# EAGLE board standalone_test (EAGLE 6.3)
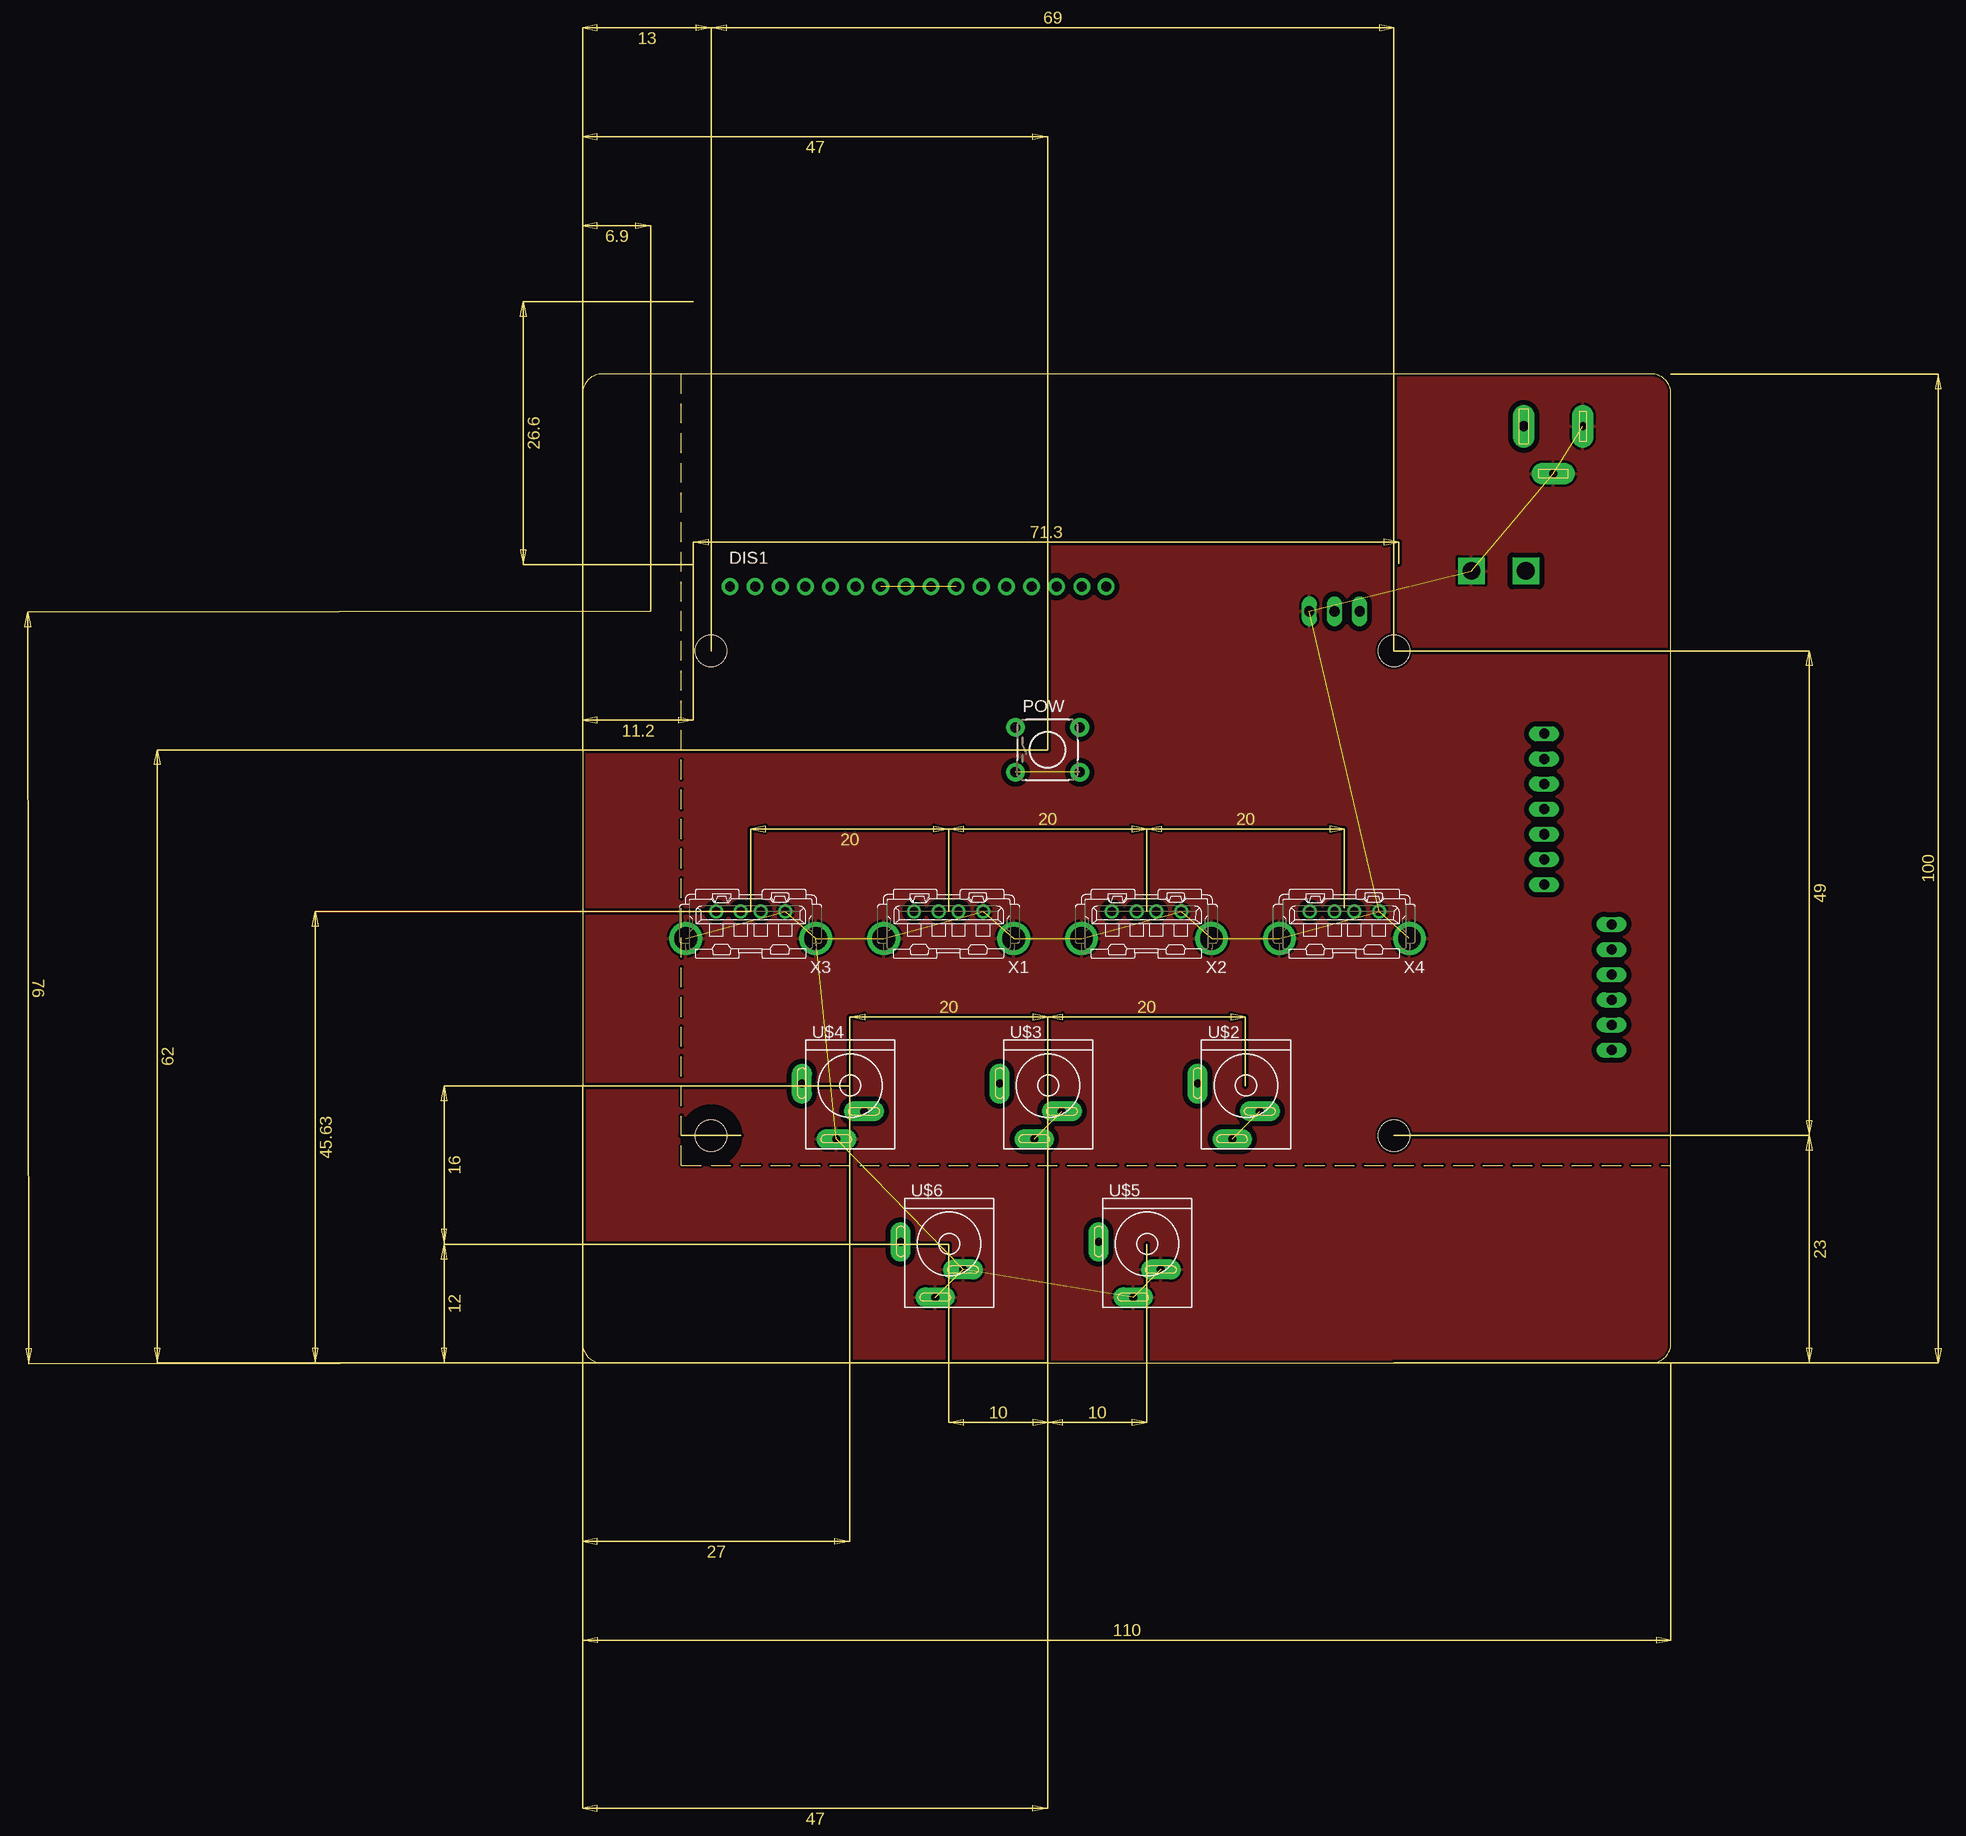
[diagram p0: board, top side]
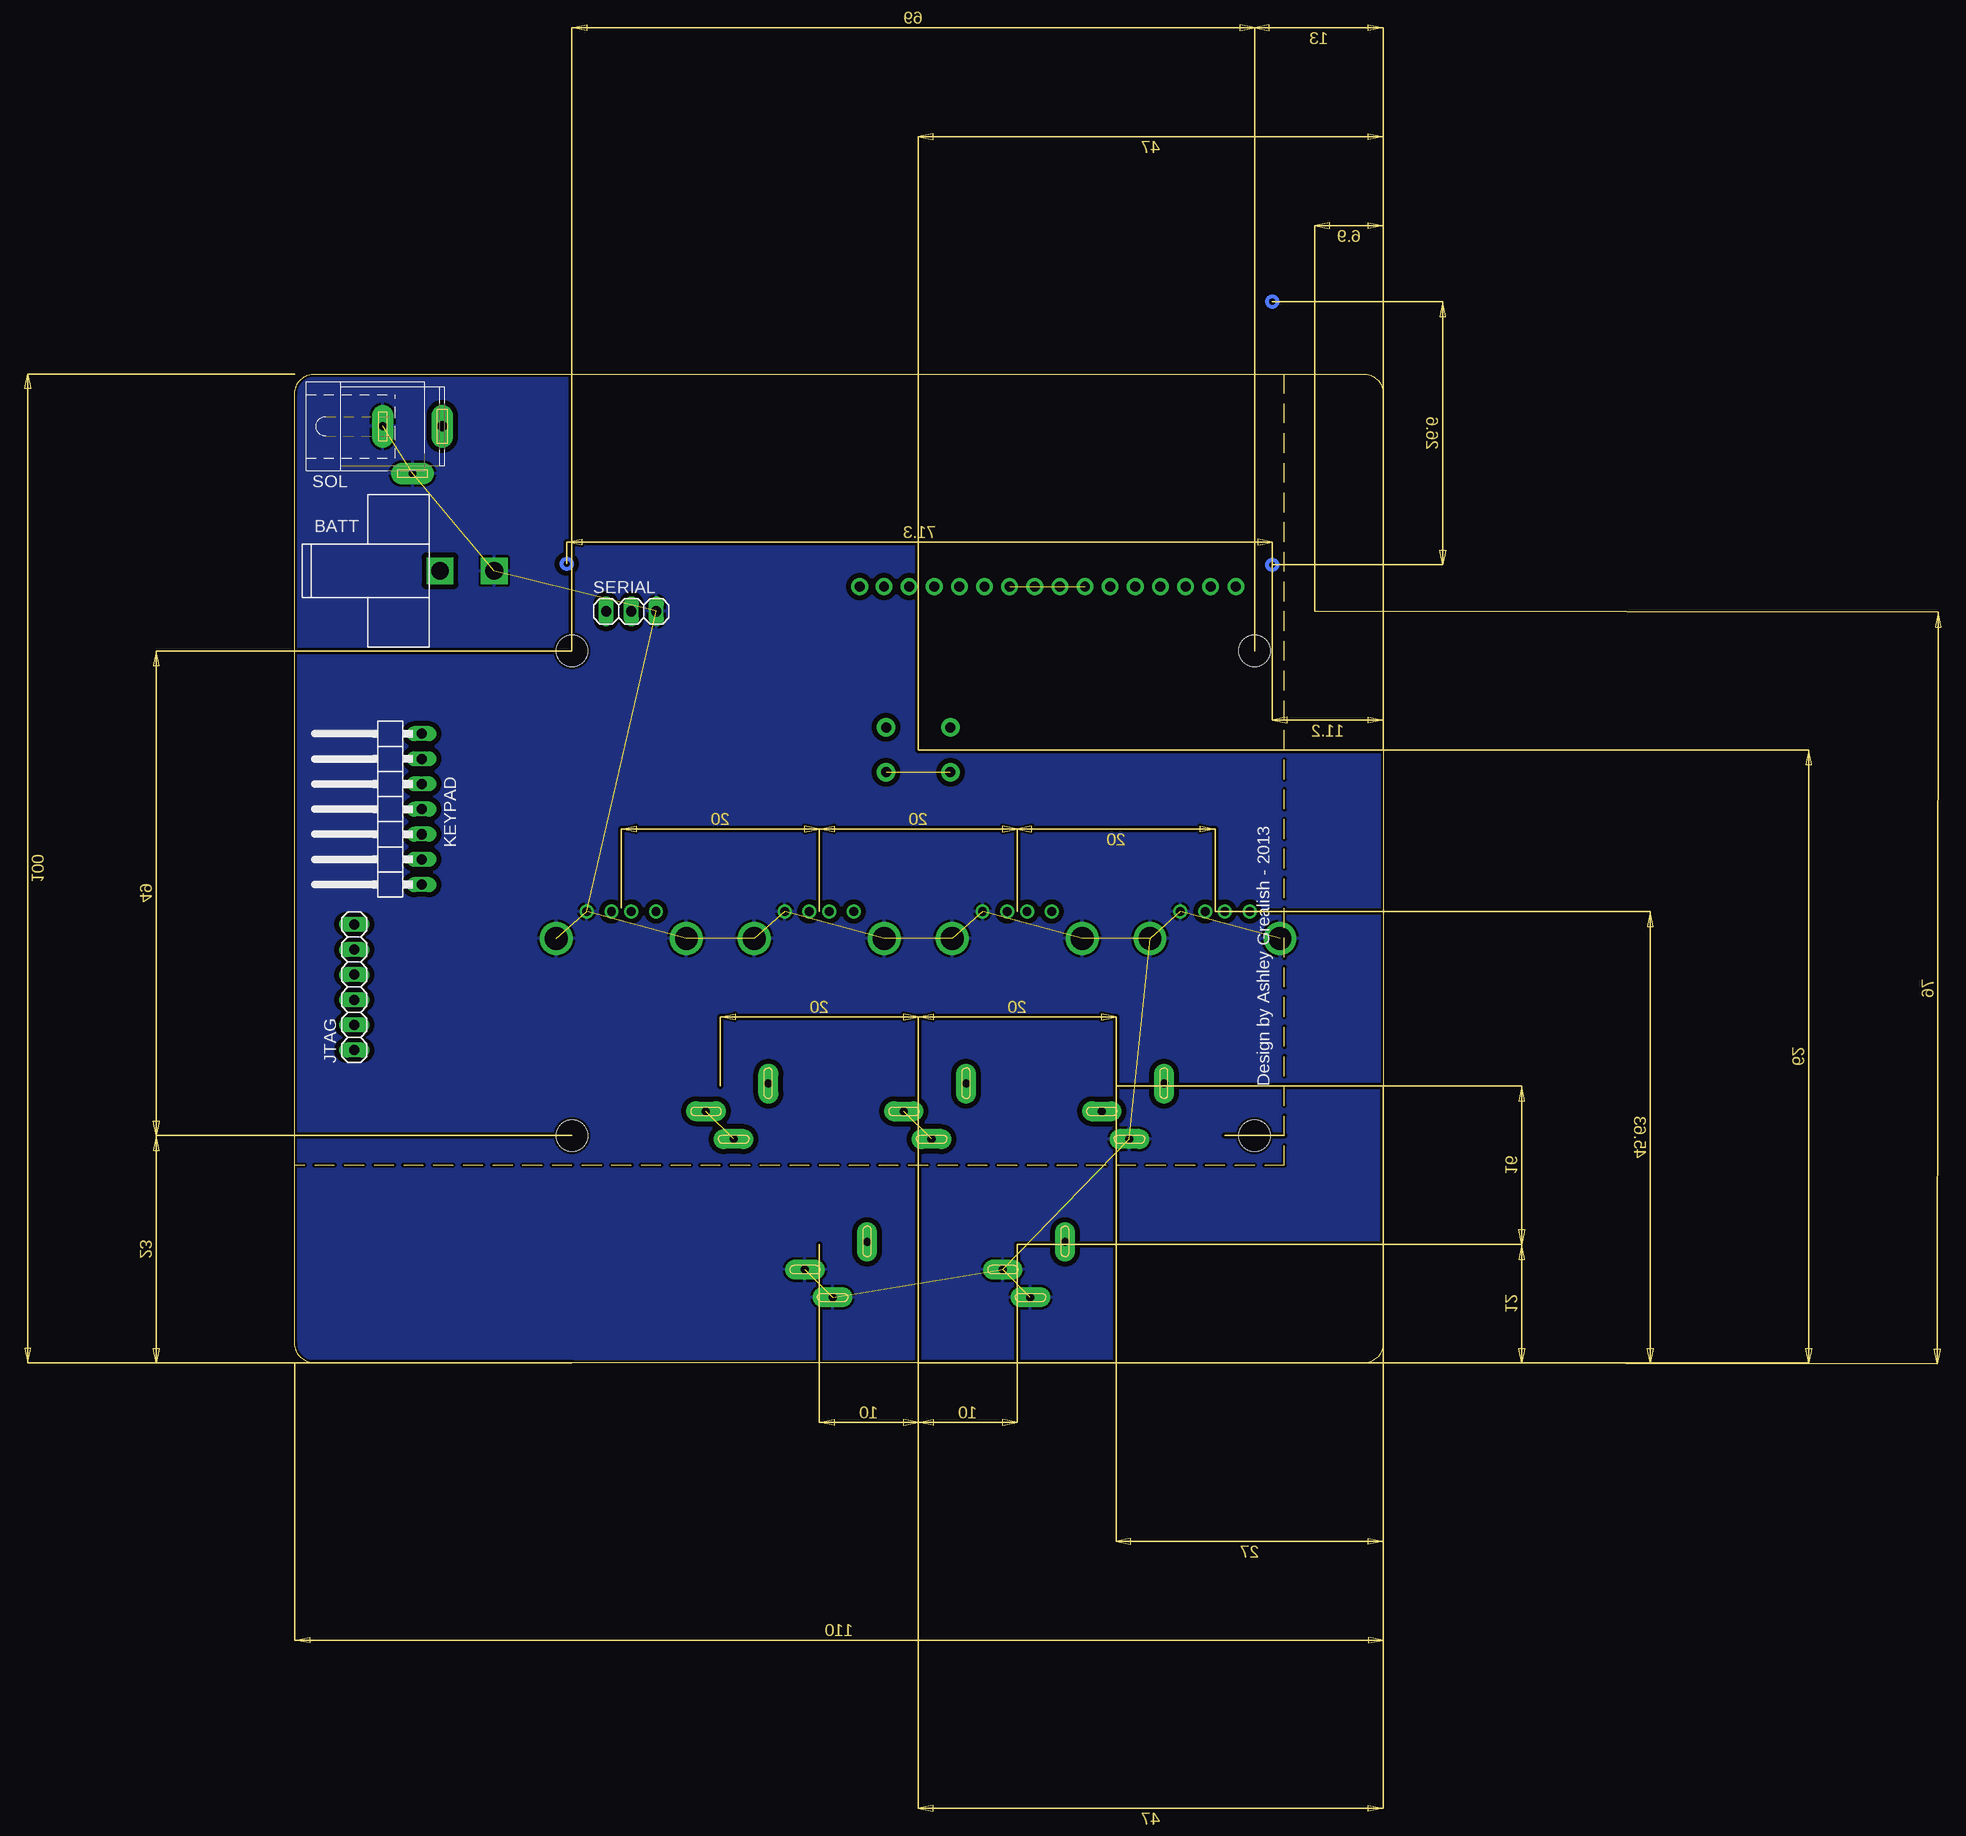
[diagram p1: board, bottom side, seen from below]

Size 110 x 100 mm. Coordinates in mm from the lower left corner, seen from the top.
Outline: 110,20 110,2 arc-90 108,0 2,0 arc-90 0,2 0,98 arc-90 2,100 10,100
Outline: 110,20 110,98 arc90 108,100 10,100
Outline: 10,100 10,20 110,20
Copper layers (1*16): Top 0.035mm / dielectric 1.5mm / Bottom 0.035mm
Design rules "Fusion_eagle_rule_v1.1": minimum track width 6mil, minimum drill 12mil, track to track 6mil, track to pad 6mil, pad to pad 6mil, via to via 6mil, smd to smd 0mil, copper to edge 10mil, drill to drill 10mil, minimum pad ring 10mil, minimum via ring 6mil, stop-mask expansion 2mil, vias tented up to drill 100mil, thermal gap 10mil
Net classes: 0 default: width 0.381 mm, drill 0.61 mm, clearance 0.381 mm; 1 pwr: width 0.026 mm, drill 0.61 mm, clearance 0.508 mm; 2 pow_12v: width 1.372 mm, drill 0.762 mm, clearance 0.508 mm; 3 gnd: width 0.508 mm, drill 0.61 mm
Holes 3.2 mm at 82,72 82,23 13,23 13,72
tRestrict: area 10,20 to 16,26

## Footprints (pad centres in the part's own frame; a part is rotated, then mirrored left to right if it is on the bottom)
MOLEX_39_29_1028 = drill 1.8 square: P$1 0,0; P$2 0,5.5
LCD_16X2_R2 = drill 1 pad 1.676: 1 8,2.5; 2 10.54,2.5; 3 13.08,2.5; 4 15.62,2.5; 5 18.16,2.5; 6 20.7,2.5; 7 23.24,2.5; 8 25.78,2.5; 9 28.32,2.5; 10 30.86,2.5; 11 33.4,2.5; 12 35.94,2.5; 13 38.48,2.5; 14 41.02,2.5; 15 43.56,2.5; 16 46.01,2.5
1X06 = drill 1.016 long: 1 -6.35,0; 2 -3.81,0; 3 -1.27,0; 4 1.27,0; 5 3.81,0; 6 6.35,0
1X07/90 = drill 1.016 long: 1 -7.62,-3.81; 2 -5.08,-3.81; 3 -2.54,-3.81; 4 0,-3.81; 5 2.54,-3.81; 6 5.08,-3.81; 7 7.62,-3.81
TACTILE-PTH = drill 1.016 pad 1.88: 1 -3.251,2.261; 2 3.251,2.261; 3 -3.251,-2.261; 4 3.251,-2.261
1X03 = drill 1.016 long: 1 -2.54,0; 2 0,0; 3 2.54,0
SPC4077 = drill 0.8 pad 2.184 long: 1 -3,0; 2 0,-4.8 | drill 1 pad 2.184 long: 3 3,0
KYCON_KLVDX_2020_B = drill 0.813 pad 2 long: 1 -4.845,0.25; 2 -1.345,-5.35; 3 1.455,-2.55
KUSBVX = drill 0.9 pad 1.3: 1 3.5,0; 2 1,0; 3 -1,0; 4 -3.5,0 | drill 2.3 pad 2.8: M1 -6.57,2.71; M2 6.57,2.71

## Placement (x,y rotation side)
BATT  CON_MOLEX_39_29_1028  [MOLEX_39_29_1028]  95.34,80.09 270 bottom
DIS1  LCD_16X2_R2  [LCD_16X2_R2]  6.9,76 0 top
JTAG  [1X06]  104,38 90 bottom
KEYPAD  [1X07/90]  101,56 90 bottom
POW  [TACTILE-PTH]  47,62 0 top
SERIAL  [1X03]  76,76 0 bottom
SOL  [SPC4077]  98.11,94.7 0 bottom
U$1  EQUINOX_LOGO_LARGE  [EQUINOX_LOGO_LARGE]  48.29,55.87 0 top
U$2  KYCON_KLDVX-0202  [KYCON_KLVDX_2020_B]  67,28 0 top
U$3  KYCON_KLDVX-0202  [KYCON_KLVDX_2020_B]  47,28 0 top
U$4  KYCON_KLDVX-0202  [KYCON_KLVDX_2020_B]  27,28 0 top
U$5  KYCON_KLDVX-0202  [KYCON_KLVDX_2020_B]  57,12 0 top
U$6  KYCON_KLDVX-0202  [KYCON_KLVDX_2020_B]  37,12 0 top
X1  KUSBVX  [KUSBVX]  37,45.63 180 top
X2  KUSBVX  [KUSBVX]  57,45.63 180 top
X3  KUSBVX  [KUSBVX]  17,45.63 180 top
X4  KUSBVX  [KUSBVX]  77,45.63 180 top

## Library data of the parts
BATT POW U$1-U$6 = equinox
DIS1 = equinox; OC_FARNELL: unknown; OC_NEWARK: unknown
JTAG KEYPAD SERIAL = pinhead
SOL = con-jack; OC_FARNELL: unknown; OC_NEWARK: unknown
X1-X4 = con-kycon

## Nets
+5V: DIS1.2
GND [pwr]: BATT.P$2 SERIAL.3 SOL.1 SOL.2 U$4.2 U$5.2 U$5.3 U$6.2 U$6.3 X1.4 X1.M1 X1.M2 X2.4 X2.M1 X2.M2 X3.4 X3.M1 X3.M2 X4.4 X4.M1 X4.M2
LCD_D4: DIS1.11
LCD_D5: DIS1.12
LCD_D6: DIS1.13
LCD_D7: DIS1.14
LCD_E: DIS1.6
LCD_RS: DIS1.4
LCD_RW: DIS1.5
N$2: DIS1.3
N$4 [pwr]: BATT.P$1
N$5 [pwr]: DIS1.7 DIS1.8 DIS1.9 DIS1.10
N$19: DIS1.15
N$20: X2.2
N$23: KEYPAD.1
N$24: KEYPAD.2
N$26: KEYPAD.3
N$27: KEYPAD.4
N$28: KEYPAD.5
N$29: KEYPAD.6
N$30: KEYPAD.7
N$31: DIS1.16
N$33: X1.2
N$34: X1.3
N$36: X2.3
N$38 [pwr]: SOL.3
N$42: X3.2
N$46 [pwr]: U$3.2 U$3.3
S$1: JTAG.1
S$6: POW.3 POW.4
S$7 [pwr]: U$2.2 U$2.3
SWCLK: JTAG.2
SWDIO: JTAG.4
SWO: JTAG.6
USART1_RX: SERIAL.1
USART1_TX: SERIAL.2
WKUP: POW.2

## Tracks (layer width: path | path; a pad name or v marks a point on that pad's centre or on a via)
GND  (20 unrouted)
  pour Bottom: 110,0 0,0 0,100 110,100
  pour Top: 110,0 0,0 0,100 110,100
N$5  (3 unrouted)
N$46  (1 unrouted)
S$6  (1 unrouted)
S$7  (1 unrouted)
(copper drawn outside any net)
  shapes: Bottom circle x3

## Text on the board
bNames: Design by Ashley Grealish - 2013
Document: M3 Bolt | M3 Bolt | M3 Bolt